# Altium PCB FPW1-0-2.PcbDoc (part 6 of 11)
Units mm, origin at the board's own origin, x right, y up, seen from the top; angles counter-clockwise.
Board outline 85 x 56 mm, 4 copper layers (Top Layer, GND_Plane, 3V3_Plane, Bottom Layer); 182 components, 321 nets, 1106 pads, 360 vias.
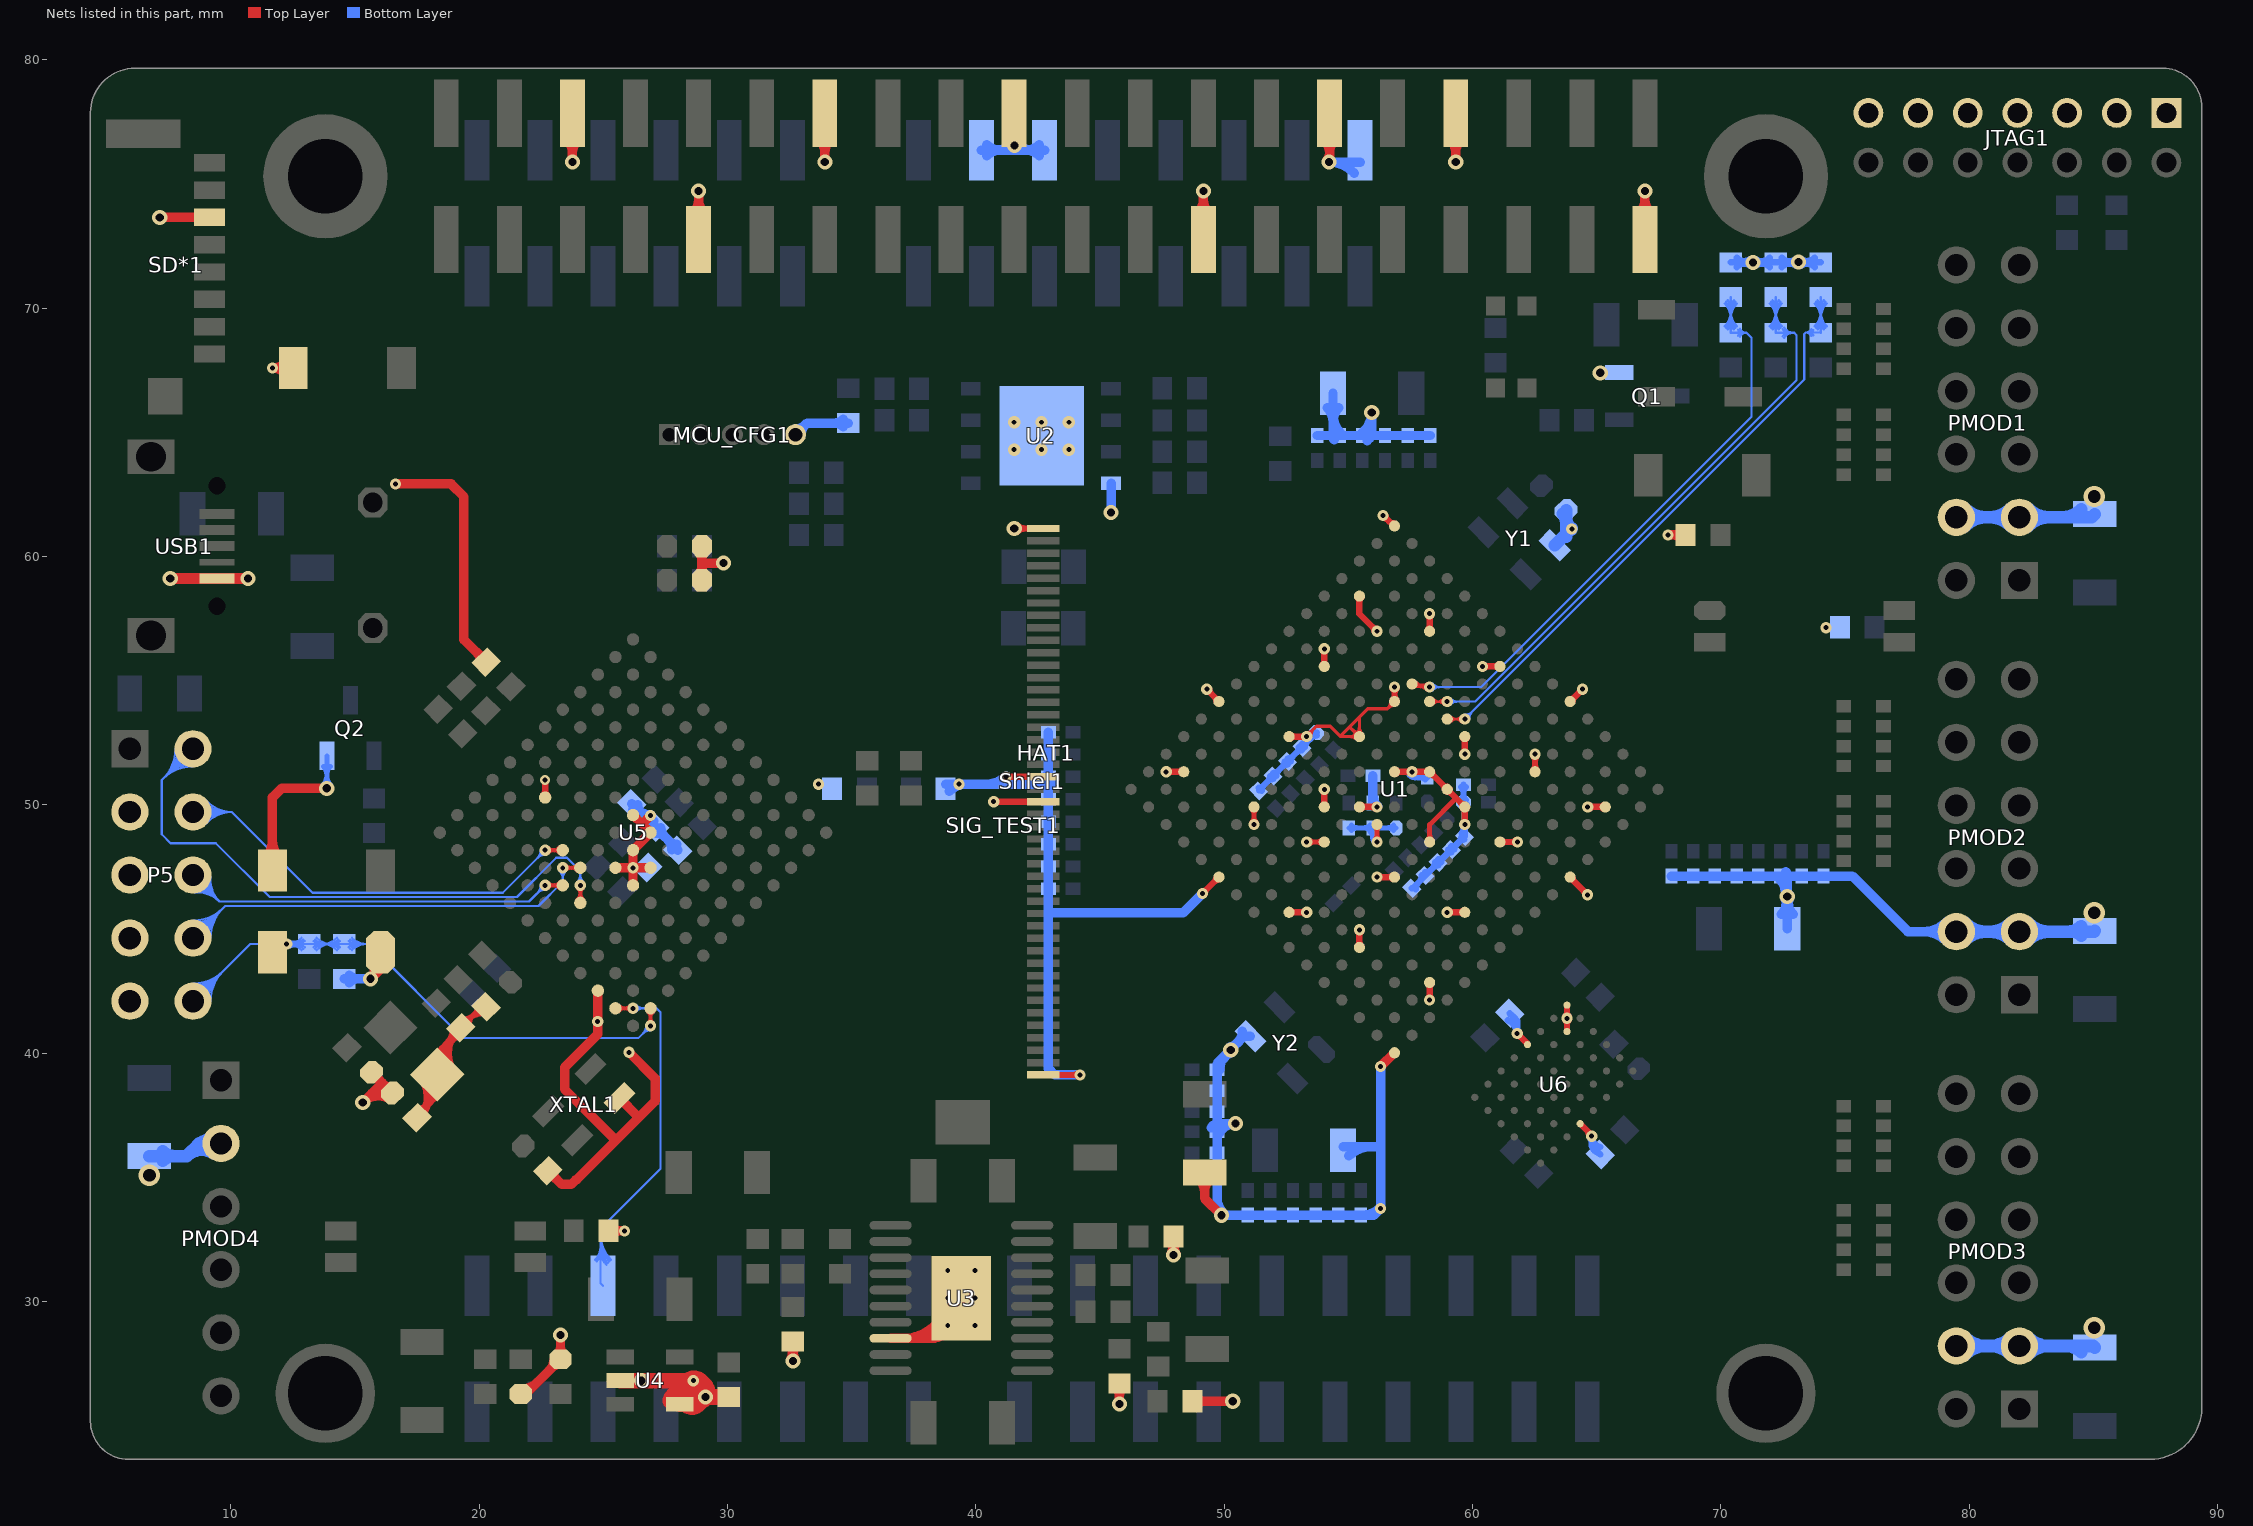
[diagram p8: the nets of this part, all layers, seen from the top]

## Via types
v1: diameter 0.45, hole 0.2, Top Layer to Bottom Layer, tented both sides, 280 vias
v2: diameter 0.61, hole 0.33, Top Layer to Bottom Layer, tented both sides, 40 vias
v3: diameter 0.403, hole 0.2, Top Layer to Bottom Layer, tented both sides, 15 vias
v4: diameter 0.5, hole 0.2, Top Layer to Bottom Layer, tented both sides, 12 vias
v5: diameter 0.864, hole 0.508, Top Layer to Bottom Layer, tented both sides, 11 vias
v6: diameter 0.864, hole 0.356, Top Layer to Bottom Layer, tented both sides, 1 vias
v7: diameter 0.864, hole 0.381, Top Layer to Bottom Layer, tented both sides, 1 vias

## Nets (pads, with @x,y where several pads share a name; then routed paths per layer and width w, separated by ;. In a path a pad name is that pad's centre, name@x,y a point inside that pad or via, vN(x,y) a via of type N, cw(c..) or ccw(c..) an arc to the next point about the centre after c; other vN are vias at no path point) (continued)
GND: C1.2 C2.1 C3.2 C4.2 C5.2 C6.2 C7.2 C8.2 C9.1 C10.2 C11.2 C12.2 C13.2 C15.2 C16.2 C17.2 C18.2 C19.2 C20.2 C21.2 C22.2 C23.2 C24.2 C25.2 C26.2 C27.2 C28.1 C29.2 C30.2 C31.2 C32.2 C33.2 C34.2 C35.1 C36.2 C37.2 C38.2 C39.2 C40.2 C41.2 C42.2 C43.2 C44.2 C45.2 C46.2 C47.2 C48.2 C49.2 C50.2 C51.2 C52.2 C53.2 C54.2 C55.2 C56.2 C58.1 C59.2 C60.2 C61.2 C62.1 C63.2 C64.1 C65.1 C66.1 C67.1 C68.1 C69.1 C70.1 C71.1 C72.2 C73.2 FB2.1 HAT1.6 HAT1.9 HAT1.14 HAT1.20 HAT1.25 HAT1.30 HAT1.34 HAT1.39 JTAG1.1 JTAG1.3 JTAG1.5 JTAG1.7 JTAG1.9 JTAG1.11 JTAG1.13 L1.2 L2.2 MCU_CFG1.5 P5.3 P5.5 P5.7 P5.9 PMOD1.3 PMOD1.4 PMOD2.3 PMOD2.4 PMOD3.3 PMOD3.4 PMOD4.2 Q1.2 Q2.2 R2.1 R5.1 R7.1 R28.1 R30.2 R34.1 R35.1 R39.1 R41.1 R53.1 R54.1 R55.1 R56.1 S1.1 S4.2 S5.1 SD*1.6 Shiel1.16 Shiel1.18 Shiel1.28 SIG_TEST1.1 SIG_TEST1.21 SIG_TEST1.23 SIG_TEST1.45 U1.A1 U1.A11 U1.B8 U1.C5 U1.C15 U1.D2 U1.D12 U1.E9 U1.F6 U1.F10 U1.F16 U1.G3 U1.G9 U1.G13 U1.H6 U1.J9 U1.J11 U1.K4 U1.K6 U1.K7 U1.K8 U1.K14 U1.L1 U1.L11 U1.M8 U1.N5 U1.N15 U1.P2 U1.P12 U1.R9 U1.T6 U1.T16 U2.4 U2.9 U3.8 U3.21 U4.2 U4.4 U5.F6 U5.F7 U5.G7 U5.G8 U5.H3 U5.H7 U5.H8 U5.M10 U6.A1 U6.B2 U6.D1 U6.E6 USB1.5 XTAL1.2 Y1.2 Y2.2 | length 411.1
  Top Layer w0.127: v1@53.298,52.752 53.713,53.167 54.275,53.167 54.69,52.752 ; v1@53.323,52.913 ccw(c53.323,53.243) 53.556,53.01 ; v1@53.484,52.752 cw(c53.934,52.752) 53.616,53.07 ; U1.J11@55.283,52.752 ccw(c54.893,52.752) 55.168,53.027 ccw(c55.444,53.303) U1.J11@55.444,52.913 ; U1.J11@55.33,52.638 ccw(c55.054,52.362) 55.054,52.752 ccw(c55.054,53.142) 55.33,52.866 ccw(c55.054,53.142) 55.444,53.142 ccw(c55.834,53.142) U1.J11@55.558,52.866 ; U1.L11@56.697,54.166 cw(c56.307,54.166) 56.583,53.89 cw(c56.858,53.615) U1.L11@56.858,54.004 ; U1.L11@56.858,54.166 56.569,53.877 55.782,53.877 55.444,53.539 ; 54.69,52.752 54.69,52.785 55.061,53.156 ; 54.69,52.752 U1.J11@55.444,52.752 ; 55.061,53.156 55.444,53.539 ; 55.061,53.156 55.061,53.135 U1.J11@55.444,52.752 ; U1.J11@55.444,52.752 55.444,53.539
  Top Layer w0.203: v1@51.114,49.303 ccw(c50.904,49.514) 51.201,49.514 ccw(c51.499,49.514) v1@51.289,49.303 ; U1.D12@51.114,49.836 cw(c50.904,49.625) 51.201,49.625 cw(c51.499,49.625) U1.D12@51.289,49.836 ; v1(51.201,49.216) U1.D12@51.201,49.923 ; v1(53.323,48.509) U1.E9@54.03,48.509 ; v1@53.41,48.422 cw(c53.621,48.211) 53.621,48.509 cw(c53.621,48.807) v1@53.41,48.596 ; U1.E9@53.943,48.422 ccw(c53.732,48.211) 53.732,48.509 ccw(c53.732,48.807) U1.E9@53.943,48.596 ; U1.H6@58.185,48.596 ccw(c57.975,48.807) 58.273,48.807 ccw(c58.57,48.807) U1.H6@58.36,48.596 ; U1.H6@58.273,48.509 58.273,49.205 59.326,50.258 59.326,50.284 ; U1.K7@58.928,50.579 U1.K7@58.98,50.63
  Top Layer w0.254: U5.H3@22.577,50.388 ccw(c22.367,50.598) 22.664,50.598 ccw(c22.961,50.598) U5.H3@22.751,50.388 ; U5.H3@22.664,50.301 v3(22.664,51.008) ; v1(40.721,50.131) SIG_TEST1.23@42.721,50.131 ; v1@40.79,50.062 cw(c40.958,49.895) 40.958,50.131 cw(c40.958,50.368) v1@40.79,50.201 ; v1(41.221,51.131) SIG_TEST1.21@42.721,51.131 ; v1@41.29,51.062 cw(c41.458,50.895) 41.458,51.131 cw(c41.458,51.368) v1@41.29,51.201 ; v2(41.548,61.131) SIG_TEST1.1@42.721,61.131 ; v2@41.674,61.006 cw(c41.977,60.702) 41.977,61.131 cw(c41.977,61.561) v2@41.674,61.257 ; SIG_TEST1.45@42.721,39.131 v1(44.199,39.131) ; v1@44.129,39.062 ccw(c43.962,38.895) 43.962,39.131 ccw(c43.962,39.368) v1@44.129,39.201 ; v1(47.666,51.337) U1.C15@48.373,51.337 ; v1@47.735,51.268 cw(c47.903,51.101) 47.903,51.337 cw(c47.903,51.574) v1@47.735,51.407 ; U1.C15@48.304,51.268 ccw(c48.136,51.101) 48.136,51.337 ccw(c48.136,51.574) U1.C15@48.304,51.407 ; v1(49.124,46.431) U1.A11@49.787,47.095 ; v1@49.124,46.529 ccw(c49.124,46.766) 49.291,46.598 ccw(c49.458,46.431) v1@49.222,46.431 ; v1@49.301,54.563 cw(c49.301,54.326) 49.469,54.494 cw(c49.636,54.661) v1@49.399,54.661 ; v1(49.301,54.661) 49.787,54.175 U1.F16@49.787,54.166 ; 49.614,54.349 cw(c49.431,54.166) U1.F16@49.689,54.166 ; U1.A11@49.689,47.095 cw(c49.453,47.095) 49.62,46.928 cw(c49.787,46.76) U1.A11@49.787,46.997 ; U1.B8@52.616,45.681 v1(53.323,45.681) ; U1.G13@52.616,52.752 v1@53.298,52.752 ; U1.B8@52.685,45.611 cw(c52.852,45.444) 52.852,45.681 cw(c52.852,45.917) U1.B8@52.685,45.75 ; U1.G13@52.685,52.682 cw(c52.852,52.515) 52.852,52.752 cw(c52.852,52.988) U1.G13@52.685,52.821 ; v1@53.253,45.611 ccw(c53.086,45.444) 53.086,45.681 ccw(c53.086,45.917) v1@53.253,45.75 ; v1@53.253,52.682 ccw(c53.086,52.515) 53.086,52.752 ccw(c53.086,52.988) v1@53.253,52.821 ; U1.F10@53.961,49.993 ccw(c53.793,50.16) 54.03,50.16 ccw(c54.266,50.16) U1.F10@54.099,49.993 ; v1@53.961,50.561 cw(c53.793,50.394) 54.03,50.394 cw(c54.266,50.394) v1@54.099,50.561 ; U1.K14@53.961,55.649 ccw(c53.793,55.817) 54.03,55.817 ccw(c54.266,55.817) U1.K14@54.099,55.649 ; v1@53.961,56.218 cw(c53.793,56.051) 54.03,56.051 cw(c54.266,56.051) v1@54.099,56.218 ; v1(54.03,50.63) U1.F10@54.03,49.923 U1.F10@54.043,49.91 ; U1.K14@54.03,55.58 v1(54.03,56.287) ; U1.C5@55.375,44.336 ccw(c55.208,44.503) 55.444,44.503 ccw(c55.681,44.503) U1.C5@55.513,44.336 ; v1@55.375,44.904 cw(c55.208,44.737) 55.444,44.737 cw(c55.681,44.737) v1@55.513,44.904 ; U1.N15@55.375,58.339 cw(c55.208,58.172) 55.444,58.172 cw(c55.681,58.172) U1.N15@55.513,58.339 ; U1.C5@55.444,44.266 v1(55.444,44.974) ; U1.G9@55.444,49.923 v1(56.151,49.923) ; U1.N15@55.444,58.409 55.444,57.697 v1(56.147,56.994) ; U1.G9@55.513,49.854 cw(c55.681,49.687) 55.681,49.923 cw(c55.681,50.16) U1.G9@55.513,49.993 ; v1@56.049,56.994 ccw(c55.812,56.994) 55.979,57.162 ccw(c56.147,57.329) v1@56.147,57.092 ; v1@56.082,49.854 ccw(c55.915,49.687) 55.915,49.923 ccw(c55.915,50.16) v1@56.082,49.993 ; v1(56.151,47.095) U1.F6@56.858,47.095 ; v1@56.221,47.026 cw(c56.388,46.858) 56.388,47.095 cw(c56.388,47.331) v1@56.221,47.164 ; v1@56.401,61.561 cw(c56.401,61.324) 56.568,61.491 cw(c56.735,61.658) v1@56.499,61.658 ; v1(56.401,61.658) 56.822,61.237 U1.T16@56.858,61.237 ; 56.629,61.43 ccw(c56.858,61.659) U1.T16@56.858,61.335 ; U1.F6@56.789,47.026 ccw(c56.622,46.858) 56.622,47.095 ccw(c56.622,47.331) U1.F6@56.789,47.164 ; U1.L11@56.789,54.235 ccw(c56.622,54.403) 56.858,54.403 ccw(c57.095,54.403) U1.L11@56.928,54.235 ; v1@56.789,54.68 cw(c56.622,54.513) 56.858,54.513 cw(c57.095,54.513) v1@56.928,54.68 ; U1.A1@56.851,40.024 U1.A1@56.858,40.024 ; U1.J9@56.858,51.337 U1.K8@58.273,51.337 U1.K7@58.98,50.63 59.326,50.284 U1.K6@59.687,49.923 v1(59.687,49.216) ; U1.L11@56.858,54.166 v1(56.858,54.75) ; U1.J9@56.928,51.268 cw(c57.095,51.101) 57.095,51.337 cw(c57.095,51.574) U1.J9@56.928,51.407 ; v1@57.496,51.268 ccw(c57.329,51.101) 57.329,51.337 ccw(c57.329,51.574) v1@57.496,51.407 ; v1@57.635,51.268 cw(c57.802,51.101) 57.802,51.337 cw(c57.802,51.574) v1@57.635,51.407 ; v1@58.203,42.214 ccw(c58.036,42.382) 58.273,42.382 ccw(c58.509,42.382) v1@58.342,42.214 ; U1.D2@58.203,42.783 cw(c58.036,42.616) 58.273,42.616 cw(c58.509,42.616) U1.D2@58.342,42.783 ; U1.K8@58.203,51.268 ccw(c58.036,51.101) 58.036,51.337 ccw(c58.036,51.574) U1.K8@58.203,51.407 ; U1.P12@58.203,57.064 ccw(c58.036,57.231) 58.273,57.231 ccw(c58.509,57.231) U1.P12@58.342,57.064 ; v1@58.203,57.632 cw(c58.036,57.465) 58.273,57.465 cw(c58.509,57.465) v1@58.342,57.632 ; v1(58.273,42.145) U1.D2@58.273,42.852 ; U1.K8@58.273,51.239 cw(c58.273,51.003) 58.44,51.17 cw(c58.607,51.337) U1.K8@58.371,51.337 ; U1.P12@58.273,56.994 v1(58.273,57.701) ; U1.K7@58.882,50.63 ccw(c58.645,50.63) 58.812,50.798 ccw(c58.98,50.965) U1.K7@58.98,50.728 ; v1(58.98,45.681) U1.G3@59.687,45.681 ; U1.K7@58.98,50.532 cw(c58.98,50.296) 59.147,50.463 cw(c59.314,50.63) U1.K7@59.078,50.63 ; v1@59.049,45.611 cw(c59.216,45.444) 59.216,45.681 cw(c59.216,45.917) v1@59.049,45.75 ; U1.K6@59.589,49.923 ccw(c59.352,49.923) 59.519,50.091 ccw(c59.687,50.258) U1.K6@59.687,50.021 ; U1.G3@59.617,45.611 ccw(c59.45,45.444) 59.45,45.681 ccw(c59.45,45.917) U1.G3@59.617,45.75 ; v1@59.617,49.285 ccw(c59.45,49.453) 59.687,49.453 ccw(c59.923,49.453) v1@59.756,49.285 ; U1.K6@59.617,49.854 cw(c59.45,49.687) 59.687,49.687 cw(c59.923,49.687) U1.K6@59.756,49.854 ; v1@59.617,52.114 ccw(c59.45,52.281) 59.687,52.281 ccw(c59.923,52.281) v1@59.756,52.114 ; U1.M8@59.617,52.682 cw(c59.45,52.515) 59.687,52.515 cw(c59.923,52.515) U1.M8@59.756,52.682 ; v1(59.687,52.045) U1.M8@59.687,52.752 ; v1(60.394,55.58) U1.R9@61.101,55.58 ; v1@60.463,55.511 cw(c60.63,55.344) 60.63,55.58 cw(c60.63,55.817) v1@60.463,55.649 ; U1.R9@61.032,55.511 ccw(c60.864,55.344) 60.864,55.58 ccw(c60.864,55.817) U1.R9@61.032,55.649 ; U1.K4@61.101,48.509 v1(61.808,48.509) ; U1.K4@61.17,48.44 cw(c61.338,48.272) 61.338,48.509 cw(c61.338,48.746) U1.K4@61.17,48.578 ; v1@61.739,48.44 ccw(c61.571,48.272) 61.571,48.509 ccw(c61.571,48.746) v1@61.739,48.578 ; v1@61.798,40.707 cw(c61.798,40.471) 61.965,40.638 cw(c62.133,40.805) v1@61.896,40.805 ; v1(61.798,40.805) 62.211,40.393 U6.D1@62.211,40.351 ; U1.N5@62.446,51.407 ccw(c62.279,51.574) 62.515,51.574 ccw(c62.752,51.574) U1.N5@62.584,51.407 ; v1@62.446,51.975 cw(c62.279,51.808) 62.515,51.808 cw(c62.752,51.808) v1@62.584,51.975 ; U1.N5@62.515,51.337 v1(62.515,52.045) ; v1@63.732,41.343 cw(c63.565,41.175) 63.802,41.175 cw(c64.038,41.175) v1@63.871,41.343 ; v1@63.732,41.481 ccw(c63.565,41.649) 63.802,41.649 ccw(c64.038,41.649) v1@63.871,41.481 ; U6.B2@63.802,40.882 v1(63.802,41.412) U6.A1@63.802,41.942 ; U1.L1@63.929,47.095 63.929,47.082 v1(64.627,46.385) ; U1.T6@63.929,54.166 63.932,54.166 v1(64.427,54.661) ; U1.T6@63.929,54.264 ccw(c63.929,54.507) 64.102,54.335 ; U1.L1@64.027,47.095 ccw(c64.295,47.095) 64.106,46.906 ; U1.T6@64.027,54.166 cw(c64.257,54.166) 64.095,54.328 ; v1@64.329,54.661 cw(c64.093,54.661) 64.26,54.494 cw(c64.427,54.326) v1@64.427,54.563 ; U6.E6@64.332,37.169 64.795,36.706 v1(64.795,36.665) ; v1@64.529,46.385 ccw(c64.292,46.385) 64.459,46.552 ccw(c64.627,46.72) v1@64.627,46.483 ; 64.599,36.902 cw(c64.361,36.665) v1@64.697,36.665 ; v1(64.636,49.923) U1.P2@65.344,49.923 ; v1@64.706,49.854 cw(c64.873,49.687) 64.873,49.923 cw(c64.873,50.16) v1@64.706,49.993 ; U1.P2@65.274,49.854 ccw(c65.107,49.687) 65.107,49.923 ccw(c65.107,50.16) U1.P2@65.274,49.993
  Top Layer w0.381: v2(7.147,73.657) SD*1.6@9.144,73.657 ; SD*1.6@8.756,73.544 ccw(c8.484,73.272) 8.484,73.657 ccw(c8.484,74.042) SD*1.6@8.756,73.77 ; S4.2@11.412,47.905 ccw(c10.756,48.562) 11.684,48.562 ccw(c12.612,48.562) S4.2@11.956,47.905 ; S4.2@11.684,47.358 11.684,50.305 12.05,50.67 v2(13.871,50.67) ; S1.1@12.238,67.337 ccw(c11.684,66.855) v1(11.684,67.589) ; S1.1@12.238,67.842 cw(c11.684,68.324) v1(11.684,67.589) ; S1.1@12.528,67.589 v1(11.684,67.589) ; C65.1@15.671,39.034 cw(c15.671,38.528) 16.029,38.886 cw(c16.387,39.243) C65.1@15.881,39.243 ; C65.1@15.671,39.243 16.104,38.811 ; 15.681,38.389 cw(c16.208,37.863) C64.1@16.555,38.521 ; S5.1@15.706,43.594 cw(c15.294,43.342) v2(15.635,43.001) 16.034,43.4 S5.1@16.034,44.069 ; C64.1@16.377,38.184 ccw(c15.955,37.385) v2(15.316,38.024) 16.104,38.811 ; C64.1@16.51,38.404 16.104,38.811 ; v1(16.637,62.928) 18.872,62.928 19.393,62.408 19.393,56.655 R41.1@20.295,55.753 ; R41.1@20.085,55.753 ccw(c19.58,55.753) 19.937,56.11 ccw(c20.295,56.468) R41.1@20.295,55.962 ; R34.1@21.679,26.288 21.879,26.288 C58.1@23.279,27.688 v2(23.279,28.664) ; R34.1@21.729,26.497 ccw(c21.729,27.365) 22.343,26.751 ; C62.1@22.771,35.071 cw(c22.771,34.566) 23.128,34.923 cw(c23.486,35.281) C62.1@22.98,35.281 ; C62.1@22.771,35.281 23.33,34.722 23.711,34.722 23.901,34.912 23.927,34.912 27.089,38.075 27.089,38.989 v1(26.035,40.043) ; 22.836,27.245 ccw(c22.393,27.688) C58.1@23.02,27.688 ; C58.1@22.957,27.365 cw(c23.229,27.093) C58.1@23.229,27.478 ; C58.1@23.131,27.836 ccw(c22.773,28.193) 23.279,28.193 ccw(c23.785,28.193) C58.1@23.427,27.836 ; HAT1.6@23.543,76.782 cw(c23.015,76.254) 23.762,76.254 cw(c24.509,76.254) HAT1.6@23.981,76.782 ; v2(23.762,75.882) HAT1.6@23.762,77.851 ; U5.M10@24.785,42.523 24.785,40.774 23.444,39.433 23.444,38.557 25.489,36.512 ; R56.1@25.211,32.855 v1(25.857,32.855) ; R56.1@25.359,32.707 cw(c25.717,32.349) 25.717,32.855 cw(c25.717,33.361) R56.1@25.359,33.003 ; U5.H7@25.492,47.473 v1(26.199,47.473) ; XTAL1.2@25.651,38.2 26.405,37.446 ; U5.H8@26.199,46.765 v1(26.199,47.473) ; U5.F6@26.199,49.594 26.549,49.244 U5.F7@26.906,48.887 U5.G7@26.199,48.18 v1(26.199,47.473) ; 26.58,49.244 v1(26.906,49.57) ; U5.G8@26.906,47.473 v1(26.199,47.473) ; HAT1.9@28.623,73.84 ccw(c28.095,74.368) 28.842,74.368 ccw(c29.589,74.368) HAT1.9@29.061,73.84 ; L1.2@28.822,59.253 ccw(c28.464,59.611) 28.97,59.611 ccw(c29.476,59.611) L1.2@29.118,59.253 ; L2.2@28.822,60.216 cw(c28.464,59.858) 28.97,59.858 cw(c29.476,59.858) L2.2@29.118,60.216 ; HAT1.9@28.842,72.771 v2(28.842,74.714) ; L1.2@28.97,59.055 28.97,59.741 ; L2.2@28.97,60.414 28.97,59.741 ; v2@29.07,26.111 v2(29.12,26.16) ; v2(29.845,59.741) 28.97,59.741 ; R30.2@32.487,28.248 cw(c32.12,27.881) v2@32.639,27.881 ; v2@32.544,27.673 ccw(c32.184,27.911) R30.2@32.601,28.023 ; R30.2@32.635,28.396 32.639,28.392 v2(32.639,27.61) ; v2@32.639,27.899 cw(c33.131,27.899) R30.2@32.783,28.248 ; R30.2@32.671,28.02 ccw(c33.071,27.913) v2@32.732,27.676 ; HAT1.14@33.703,76.782 cw(c33.175,76.254) 33.922,76.254 cw(c34.669,76.254) HAT1.14@34.141,76.782 ; v2(33.922,75.882) HAT1.14@33.922,77.851 ; U3.8@36.571,28.525 38.346,28.525 v4(38.871,29.05) ; U3.8@37.08,28.525 ccw(c37.08,30.336) U3.21@38.818,29.827 ; 37.588,28.525 ccw(c37.588,30.187) U3.21@39.183,29.719 ; 38.097,28.525 ccw(c38.097,30.038) U3.21@39.549,29.612 ; U3.21@38.273,28.587 ccw(c37.955,29.488) U3.21@38.817,29.075 ; U3.21@38.627,28.988 cw(c38.746,28.723) U3.21@38.85,28.994 ; U3.21@38.859,29.108 ccw(c38.664,30.091) U3.21@39.497,29.534 ; U3.21@38.928,29.066 cw(c39.24,29.155) U3.21@38.957,29.313 ; C61.2@45.635,26.558 cw(c45.278,26.201) 45.784,26.201 cw(c46.289,26.201) C61.2@45.932,26.558 ; v2(45.784,25.883) C61.2@45.784,26.707 ; C60.2@47.809,32.428 cw(c47.451,32.071) 47.957,32.071 cw(c48.462,32.071) C60.2@48.105,32.428 ; v2@47.862,31.952 ccw(c47.563,32.151) C60.2@47.91,32.244 ; v2(47.957,31.888) C60.2@47.957,32.626 ; C60.2@48.003,32.244 ccw(c48.35,32.151) v2@48.052,31.952 ; R35.1@48.719,25.997 v2(50.343,25.997) ; R35.1@48.867,25.849 cw(c49.224,25.491) 49.224,25.997 cw(c49.224,26.503) R35.1@48.867,26.145 ; HAT1.25@48.943,73.84 ccw(c48.415,74.368) 49.162,74.368 ; C6.2@48.976,34.968 cw(c48.405,34.397) 49.212,34.397 cw(c50.02,34.397) C6.2@49.449,34.968 ; HAT1.25@49.162,72.771 v2(49.162,74.714) ; 49.162,74.368 ccw(c49.909,74.368) HAT1.25@49.381,73.84 ; C6.2@49.212,35.204 49.212,34.163 v2(49.89,33.485) ; HAT1.30@54.023,76.782 cw(c53.495,76.254) 54.242,76.254 cw(c54.989,76.254) HAT1.30@54.461,76.782 ; v2@54.135,75.963 ccw(c53.879,76.22) 54.242,76.22 ; v2(54.216,75.882) 54.242,75.908 HAT1.30@54.242,77.851 ; v1(56.299,39.472) U1.A1@56.851,40.024 ; HAT1.34@59.103,76.782 cw(c58.575,76.254) 59.322,76.254 cw(c60.069,76.254) HAT1.34@59.541,76.782 ; v2(59.322,75.882) HAT1.34@59.322,77.851 ; HAT1.39@66.723,73.84 ccw(c66.195,74.368) 66.942,74.368 ccw(c67.689,74.368) HAT1.39@67.161,73.84 ; HAT1.39@66.942,72.771 v2(66.942,74.714) ; v1(67.869,60.871) R28.1@68.579,60.871 ; R28.1@68.43,60.723 ccw(c68.073,60.365) 68.073,60.871 ccw(c68.073,61.377) R28.1@68.43,61.019 ; 16.153,38.762 cw(c15.795,38.404) C64.1@16.301,38.404 ; 16.153,38.762 ccw(c16.51,39.12) C64.1@16.51,38.614 ; 16.153,38.762 cw(c15.795,38.404) C64.1@16.301,38.404 ; 16.153,38.762 ccw(c16.51,39.12) C64.1@16.51,38.614 ; 16.153,38.762 cw(c15.795,38.404) C64.1@16.301,38.404 ; 16.153,38.762 ccw(c16.51,39.12) C64.1@16.51,38.614
  Top Layer w0.432: v2(7.566,59.122) USB1.5@9.449,59.122 v2(10.703,59.122)
  Top Layer w0.635: U4.2@25.686,26.822 v2(26.543,26.822) 28.067,26.822 ; U4.4@27.696,26 cw(c28.141,25.911) 28.141,26.365 ; U4.4@28.086,26.115 cw(c28.961,26.115) v1@28.586,26.906 ; 28.086,26.282 cw(c28.728,26.282) v1@28.609,26.913 ; U4.4@28.319,25.876 cw(c28.915,25.757) v2@28.915,26.365 ; U4.4@28.324,25.859 ccw(c28.571,26.133) 28.831,25.872 ; U4.4@28.334,25.855 ccw(c28.437,26.744) v2@29.07,26.111 ; U4.4@28.455,25.872 ccw(c28.455,26.825) v2@29.129,26.152 ; v1@28.626,26.915 cw(c28.626,26.464) 28.945,26.783 ; v1@28.653,26.911 cw(c28.482,26.348) v2@29.07,26.348 ; 28.656,26.365 cw(c28.656,25.697) v2@29.129,26.169 ; v1@28.672,26.742 cw(c28.422,27.177) 28.067,26.822 ; v1@28.677,26.746 cw(c28.417,27.134) 28.086,26.803 ; v1@28.685,26.893 cw(c27.988,26.066) v2@29.07,26.066 ; v1@28.712,26.788 cw(c28.086,27.04) 28.086,26.365 ; v2@29.13,26.154 ccw(c28.78,26.367) 29.07,26.657 ; v2@29.132,26.159 ccw(c28.342,26.259) 28.905,26.822 ; C59.2@30.048,26.16 v2(29.12,26.16) v2@29.07,26.21 ; 28.067,26.822 28.086,26.803 ; 28.067,26.822 v1(28.626,26.822) 28.905,26.822 ; 28.086,26.365 v2@28.915,26.365 ; 28.086,26.365 U4.4@28.086,25.872 28.832,25.872 ; 28.086,26.365 28.086,26.803 ; 28.832,25.872 v2@29.07,26.111 ; 28.905,26.822 29.07,26.657 ; v2@28.915,26.365 v2@29.07,26.21 ; v2@29.07,26.111 v2@29.07,26.21 ; v2@29.07,26.21 29.07,26.657
  Bottom Layer w0.203: v2@13.727,50.814 ccw(c13.38,51.161) 13.871,51.161 ccw(c14.361,51.161) v2@14.015,50.814 ; Q2.2@13.731,51.558 cw(c13.392,51.22) 13.871,51.22 cw(c14.35,51.22) Q2.2@14.011,51.558 ; v2(13.871,50.67) Q2.2@13.871,51.974
  Bottom Layer w0.254: C23.2@51.386,50.692 ccw(c51.386,50.959) 51.575,50.77 ; C23.2@51.399,50.582 51.399,50.595 C13.2@53.126,52.322 ; C23.2@51.509,50.569 cw(c51.837,50.569) 51.605,50.801 ; C21.2@51.847,51.166 cw(c51.551,51.166) 51.76,50.956 cw(c51.97,50.746) C21.2@51.97,51.043 ; C21.2@51.97,51.289 ccw(c51.97,51.586) 52.18,51.376 ccw(c52.39,51.166) C21.2@52.093,51.166 ; C18.2@52.432,51.75 cw(c52.135,51.75) 52.345,51.54 cw(c52.555,51.331) C18.2@52.555,51.627 ; C18.2@52.555,51.873 ccw(c52.555,52.17) 52.765,51.96 ccw(c52.975,51.75) C18.2@52.678,51.75 ; C13.2@53.003,52.322 cw(c52.706,52.322) 52.916,52.112 cw(c53.126,51.902) C13.2@53.126,52.199 ; C13.2@53.105,52.398 ccw(c52.966,52.637) v1@53.229,52.722 ; C13.2@53.126,52.445 ccw(c53.126,52.742) 53.336,52.532 ccw(c53.546,52.322) C13.2@53.249,52.322 ; v1@53.229,52.724 cw(c52.839,52.609) C13.2@53.126,52.322 ; v1@53.258,52.678 cw(c53.143,52.547) C13.2@53.294,52.46 ; v1@53.359,52.843 ccw(c53.483,53.159) C8.2@53.723,52.919 C13.2@53.126,52.322 ; v1@53.362,52.842 ccw(c53.45,53.047) C8.2@53.644,52.935 ; C8.2@53.6,52.919 cw(c53.303,52.919) 53.513,52.709 cw(c53.723,52.499) C8.2@53.723,52.796 ; v1@57.439,51.246 ccw(c57.681,51.421) 57.681,51.122 ; v1@57.527,51.337 v1(57.565,51.337) 57.781,51.122 FB2.1@58.179,51.122 cw(c58.179,51.781) v1@57.645,51.395 ; C22.2@57.552,46.647 57.59,46.647 C20.2@59.675,48.732 59.687,48.743 v1(59.687,49.216) 59.687,50.025 C28.1@59.635,50.078 ; C22.2@57.711,46.612 cw(c58.087,46.612) 57.821,46.877 ; 57.853,46.91 ccw(c57.594,47.168) C15.2@57.96,47.168 ; C15.2@58.083,47.291 ccw(c58.083,47.657) 58.342,47.398 ; FB2.1@58.092,51.035 ccw(c57.882,50.825) 57.882,51.122 ccw(c57.882,51.419) FB2.1@58.092,51.209 ; 58.39,47.447 ccw(c58.148,47.689) C10.2@58.491,47.689 ; 58.436,47.493 cw(c58.614,47.315) C10.2@58.614,47.566 ; C10.2@58.614,47.812 ccw(c58.614,48.155) 58.856,47.913 ; C10.2@58.737,47.689 cw(c58.988,47.689) 58.81,47.867 ; 58.928,47.985 ccw(c58.702,48.211) C19.2@59.022,48.211 ; 58.951,48.007 cw(c59.145,47.814) C19.2@59.145,48.088 ; C19.2@59.145,48.334 ccw(c59.145,48.654) 59.371,48.427 ; C19.2@59.268,48.211 cw(c59.542,48.211) 59.348,48.404 ; C28.1@59.548,50.201 ccw(c59.338,50.411) 59.635,50.411 ccw(c59.931,50.411) C28.1@59.721,50.201 ; C35.1@59.548,50.726 cw(c59.338,50.516) 59.635,50.516 cw(c59.931,50.516) C35.1@59.721,50.726 ; C20.2@59.552,48.732 cw(c59.255,48.732) 59.465,48.522 cw(c59.675,48.312) C20.2@59.675,48.609 ; C28.1@59.598,50.027 cw(c59.382,49.812) 59.687,49.812 ; v1@59.617,49.147 cw(c59.45,48.98) 59.687,48.98 cw(c59.923,48.98) v1@59.756,49.147 ; v1@59.617,49.285 ccw(c59.45,49.453) 59.687,49.453 ccw(c59.923,49.453) v1@59.756,49.285 ; C28.1@59.635,50.166 C35.1@59.635,50.813 ; 59.687,49.823 cw(c59.976,49.823) C28.1@59.771,50.027 ; C71.1@61.421,41.331 cw(c61.176,40.76) v1@61.798,40.76 ; C71.1@61.493,41.618 61.798,41.312 v1(61.798,40.805) ; C71.1@61.521,41.565 cw(c61.341,41.145) 61.798,41.145 ; 61.718,41.058 ccw(c61.986,41.13) v1@61.847,40.89 ; v1@61.729,40.874 ccw(c61.562,41.042) 61.798,41.042 ccw(c62.035,41.042) v1@61.867,40.874 ; v1@64.726,36.596 cw(c64.559,36.428) 64.795,36.428 cw(c65.032,36.428) v1@64.865,36.596 ; 64.795,36.358 ccw(c65.178,36.358) C70.1@65.107,35.983 ; C70.1@65.139,35.929 64.795,36.272 v1(64.795,36.665) ccw(c65.236,36.665) C70.1@65.154,36.232 ; R7.1@70.396,71.845 R5.1@72.206,71.845 R2.1@74.016,71.845 ; R7.1@70.639,71.652 cw(c71.105,71.186) 71.105,71.845 cw(c71.105,72.504) R7.1@70.639,72.038 ; 70.851,71.913 ccw(c70.945,72.263) v2@71.173,71.982 ; 70.852,71.845 cw(c70.852,71.411) v2@71.159,71.718 ; 70.856,71.779 cw(c70.946,71.443) v2@71.17,71.708 ; 70.859,71.845 ccw(c70.859,72.27) v2@71.159,71.97 ; 70.964,71.883 cw(c70.893,71.617) v2@71.131,71.755 ; 70.97,71.809 ccw(c70.901,72.065) v2@71.131,71.933 ; v2@71.397,71.982 ccw(c71.638,72.28) 71.737,71.91 ; v2@71.4,71.708 cw(c71.637,71.427) 71.732,71.782 ; v2@71.411,71.718 cw(c71.718,71.411) 71.718,71.845 ; v2@71.411,71.97 ccw(c71.711,72.27) 71.711,71.845 ; v2@71.439,71.755 cw(c71.653,71.631) 71.589,71.87 ; R5.1@71.963,71.652 ccw(c71.497,71.186) 71.497,71.845 ccw(c71.497,72.504) R5.1@71.963,72.038 ; R5.1@72.449,71.652 cw(c72.915,71.186) 72.915,71.845 cw(c72.915,72.504) R5.1@72.449,72.038 ; 72.659,71.777 cw(c72.772,71.356) v2@73.024,71.711 ; 72.67,71.845 ccw(c72.67,72.313) v2@73.001,71.982 ; 72.695,71.904 ccw(c72.779,72.215) v2@73.003,71.984 ; 72.724,71.845 cw(c72.724,71.454) v2@73.001,71.731 ; 72.803,71.815 ccw(c72.731,72.085) v2@72.973,71.945 ; v2@73.229,71.711 cw(c73.469,71.372) R2.1@73.576,71.773 ; v2@73.251,71.984 ccw(c73.462,72.199) 73.54,71.908 ; v2@73.252,71.731 cw(c73.529,71.454) 73.529,71.845 ; v2@73.252,71.982 ccw(c73.583,72.313) R2.1@73.583,71.845 ; v2@73.281,71.945 ccw(c73.547,72.099) 73.467,71.802 ; R2.1@73.773,71.652 ccw(c73.307,71.186) 73.307,71.845 ccw(c73.307,72.504) R2.1@73.773,72.038 ; C20.2@59.553,48.854 ccw(c59.23,49.177) v1@59.687,49.177 ; C20.2@59.553,48.854 ccw(c59.23,49.177) v1@59.687,49.177 ; C20.2@59.553,48.854 ccw(c59.23,49.177) v1@59.687,49.177 ; v1@59.602,49.166 cw(c59.378,49.033) C20.2@59.63,48.966 ; v1@59.602,49.166 cw(c59.378,49.033) C20.2@59.63,48.966 ; v1@59.602,49.166 cw(c59.378,49.033) C20.2@59.63,48.966
  Bottom Layer w0.381: C69.1@14.58,43.001 v2(15.635,43.001) ; C69.1@14.778,42.853 cw(c15.135,42.495) 15.135,43.001 cw(c15.135,43.506) C69.1@14.778,43.149 ; C66.1@26.15,50.051 28.004,48.197 C67.1@28.004,48.171 ; C66.1@26.185,49.806 cw(c26.185,49.3) 26.543,49.658 cw(c26.9,50.016) C66.1@26.394,50.016 ; C66.1@26.376,49.825 ccw(c26.906,50.355) v1@26.906,49.605 ; 26.675,49.526 cw(c26.295,49.147) C68.1@26.832,49.147 ; v1@26.705,49.495 ccw(c27.041,49.831) C68.1@27.041,49.356 ; C68.1@26.941,49.57 ccw(c27.691,49.57) C68.1@27.161,49.04 ; C68.1@27.112,48.866 cw(c27.112,48.33) 27.491,48.709 ; C68.1@27.322,49.076 ccw(c27.797,49.076) 27.461,48.74 ; 27.593,48.608 cw(c27.192,48.207) C67.1@27.759,48.207 ; 27.654,48.546 ccw(c27.968,48.861) C67.1@27.968,48.416 ; MCU_CFG1.5@32.741,64.91 33.209,65.378 C1.2@34.861,65.378 ; MCU_CFG1.5@32.741,65.144 ccw(c32.741,65.71) 33.141,65.31 ccw(c33.541,64.91) MCU_CFG1.5@32.975,64.91 ; C1.2@34.663,65.23 ccw(c34.306,64.872) 34.306,65.378 ccw(c34.306,65.884) C1.2@34.663,65.526 ; R53.1@38.787,50.838 v1(39.319,50.838) ; R53.1@38.935,50.549 cw(c39.632,49.853) 39.632,50.838 ; Shiel1.16@40.229,76.365 Shiel1.18@42.769,76.365 ; 40.43,50.838 ccw(c40.43,51.923) v1@41.197,51.156 ; Shiel1.16@40.447,76.146 cw(c40.976,75.618) 40.976,76.365 cw(c40.976,77.112) Shiel1.16@40.447,76.584 ; 40.819,76.365 ccw(c40.819,77.291) v2@41.474,76.636 ; v1@41.245,51.156 ccw(c42.013,51.923) 42.013,50.838 ; v2@41.635,76.636 ccw(c42.29,77.291) Shiel1.18@42.29,76.365 ; 42.022,50.838 ccw(c42.022,51.979) C37.2@42.829,51.172 ; Shiel1.18@42.55,76.146 ccw(c42.021,75.618) 42.021,76.365 ccw(c42.021,77.112) Shiel1.18@42.55,76.584 ; 42.921,50.838 v1(39.319,50.838) ; C27.2@42.921,52.934 C32.2@42.921,52.032 C45.2@42.921,49.327 C49.2@42.921,48.425 C53.2@42.921,47.523 C55.2@42.921,46.622 42.921,45.657 ; 42.942,50.838 ccw(c42.942,51.059) C37.2@43.099,50.903 ; v1(44.199,39.131) 43.177,39.131 42.921,39.387 42.921,45.657 ; v2(45.447,61.779) U2.4@45.447,62.954 ; v1(49.124,46.431) 48.349,45.657 42.921,45.657 ; C17.2@49.488,37.01 cw(c49.778,36.833) 49.778,37.173 ; 49.713,34.19 ccw(c50.595,34.19) v2@49.971,33.566 ; C17.2@49.813,36.812 cw(c50.457,36.419) v2(50.457,37.173) 49.713,37.173 ; C16.2@49.822,39.346 cw(c50.676,39.346) v2@50.072,39.95 ; 49.98,39.79 cw(c50.424,39.534) v2@50.291,40.029 ; v2@50.232,40.25 ccw(c50.073,40.844) 50.605,40.536 ; 50.532,40.411 ccw(c50.06,40.883) Y2.2@50.728,40.883 ; Y2.2@51.057,40.689 50.811,40.689 49.713,39.591 49.713,37.173 ; C46.2@53.746,64.876 55.944,64.876 ; C50.2@54.145,66 cw(c53.574,65.429) 54.381,65.429 cw(c55.189,65.429) C50.2@54.618,66 ; 54.381,64.813 ccw(c54.542,64.813) C42.2@54.428,64.699 ; 54.381,64.889 C50.2@54.381,66.586 ; C50.2@54.381,65.733 ccw(c55.462,65.733) C42.2@54.698,64.968 ; C51.2@54.788,36.246 56.299,36.246 ; C51.2@55.025,35.87 cw(c55.933,34.961) 55.933,36.246 ; Shiel1.28@55.243,75.438 ccw(c54.216,74.474) v2(54.216,75.882) Shiel1.28@55.486,75.882 ; C38.2@55.529,64.974 ccw(c54.915,65.799) v2(55.944,65.799) 55.944,64.876 ; C47.2@55.561,33.485 ccw(c55.561,34.495) v1@56.275,33.781 ; C38.2@55.757,64.668 ccw(c55.481,65.04) 55.944,65.04 ; C9.1@55.982,50.081 55.986,50.086 C5.2@55.986,51.181 ; 55.986,50.405 ccw(c56.633,50.405) C9.1@56.176,49.948 ; v1(56.299,39.472) v1(56.299,33.757) 56.028,33.485 C47.2@55.499,33.485 C43.2@54.59,33.485 C39.2@53.68,33.485 C25.2@50.952,33.485 v2(49.89,33.485) 49.713,33.663 C4.2@49.713,35.166 49.713,37.173 ; C24.2@58.293,64.876 C29.2@57.384,64.876 C33.2@56.474,64.876 55.944,64.876 ; C26.2@68.008,47.138 C31.2@68.883,47.138 C36.2@69.757,47.138 C40.2@70.632,47.138 C44.2@71.506,47.138 C48.2@72.606,47.138 ; C48.2@72.339,47.046 cw(c71.54,46.247) v2@72.67,46.247 ; C56.2@72.433,45.608 ccw(c71.862,46.179) 72.67,46.179 ccw(c73.477,46.179) C56.2@72.906,45.608 ; 72.57,46.62 ccw(c72.895,46.708) v2@72.727,46.416 ; v2@72.57,46.26 cw(c72.225,46.061) 72.61,45.957 ; C48.2@72.608,47.315 cw(c72.46,47.167) 72.67,47.167 ; C56.2@72.67,45.021 72.67,47.074 C48.2@72.606,47.138 ; 72.729,45.958 cw(c73.112,46.061) v2@72.768,46.26 ; PMOD2.4@79.081,44.505 ccw(c78.126,43.55) 78.126,44.901 ccw(c78.126,46.252) PMOD2.4@79.081,45.296 ; PMOD2.4@79.477,44.901 77.527,44.901 75.29,47.138 C54.2@74.13,47.138 C52.2@73.255,47.138 C48.2@72.606,47.138 ; v1(39.319,50.838) ccw(c39.319,50.468) 38.98,50.615 cw(c39.319,50.468) v1(39.319,50.838)
  Bottom Layer w0.508: C3.2@6.718,35.865 8.229,35.865 ; C3.2@7.26,35.673 cw(c7.723,35.21) 7.723,35.865 cw(c7.723,36.519) C3.2@7.26,36.056 ; 8.66,36.296 cw(c9.193,35.763) PMOD4.2@9.621,36.383 ; PMOD4.2@9.189,36.118 ccw(c8.738,35.847) 8.738,36.373 ; PMOD4.2@9.189,36.628 cw(c8.738,36.899) 8.738,36.373 ; PMOD4.2@9.332,35.965 ccw(c8.841,35.253) 8.229,35.865 ; PMOD4.2@9.614,36.373 8.738,36.373 ; Y1.2@63.307,60.454 63.766,60.913 C2.1@63.766,61.862 ; C2.1@63.628,61.723 cw(c63.293,61.389) 63.766,61.389 ; 63.766,60.809 cw(c64.125,60.809) v1@63.984,61.139 ; C2.1@63.766,61.595 ccw(c64.478,61.595) v1@63.975,61.092 ; PMOD3.4@79.477,28.219 PMOD3.3@82.017,28.219 84.989,28.219 C63.2@85.052,28.156 ; PMOD2.4@79.477,44.901 PMOD2.3@82.017,44.901 85.02,44.901 C72.2@85.052,44.933 ; PMOD1.4@79.477,61.582 PMOD1.3@82.017,61.582 84.925,61.582 C73.2@85.052,61.71 ; PMOD3.4@79.827,27.869 cw(c80.674,27.022) 80.674,28.219 cw(c80.674,29.417) PMOD3.4@79.827,28.57 ; PMOD2.4@79.827,44.55 cw(c80.674,43.703) 80.674,44.901 cw(c80.674,46.098) PMOD2.4@79.827,45.252 ; PMOD1.4@79.827,61.232 cw(c80.674,60.385) 80.674,61.582 cw(c80.674,62.78) PMOD1.4@79.827,61.933 ; PMOD3.3@81.666,27.869 ccw(c80.819,27.022) 80.819,28.219 ccw(c80.819,29.417) PMOD3.3@81.666,28.57 ; PMOD2.3@81.666,44.55 ccw(c80.819,43.703) 80.819,44.901 ccw(c80.819,46.098) PMOD2.3@81.666,45.252 ; PMOD1.3@81.666,61.232 ccw(c80.819,60.385) 80.819,61.582 ccw(c80.819,62.78) PMOD1.3@81.666,61.933 ; PMOD3.3@82.367,27.869 cw(c83.214,27.022) 83.214,28.219 cw(c83.214,29.417) PMOD3.3@82.367,28.57 ; PMOD2.3@82.367,44.55 cw(c83.214,43.703) 83.214,44.901 cw(c83.214,46.098) PMOD2.3@82.367,45.252 ; PMOD1.3@82.367,61.232 cw(c83.214,60.385) 83.214,61.582 cw(c83.214,62.78) PMOD1.3@82.367,61.933 ; 83.741,61.582 ccw(c83.741,62.671) C73.2@84.51,61.901 ; 83.895,28.219 cw(c83.895,27.349) C63.2@84.51,27.964 ; 83.971,44.901 ccw(c83.971,45.664) C72.2@84.51,45.124 ; 84.125,44.901 cw(c84.125,44.356) C72.2@84.51,44.741 ; 8.229,35.865 8.738,36.373
  other v1: 24.778,41.288 33.668,50.838 53.323,52.752 74.231,57.137 63.995,61.112
  other v2: 50.262,40.14 72.669,46.317 65.138,67.399 71.285,71.844 73.127,71.857 41.554,76.556
  other v4: 39.971,29.05 38.871,30.15 39.971,30.15 38.871,31.25 39.971,31.25 41.547,64.309 42.647,64.309 43.747,64.309 41.547,65.409 42.647,65.409 43.747,65.409
  other v5: 85.026,28.956 6.731,35.09 85.026,45.669 85.026,62.42
JTAG_TCK: P5.4 U5.J5 | length 29.5
  Top Layer w0.089: v1(22.664,48.18) U5.J5@23.371,48.18 ; v1@22.734,48.121 cw(c22.857,48.02) 22.898,48.174 ; v1@22.734,48.238 ccw(c22.857,48.339) 22.898,48.186 ; v1@22.791,48.052 cw(c23.1,47.744) 23.1,48.18 cw(c23.1,48.616) v1@22.791,48.307 ; v1@22.803,48.065 cw(c22.974,47.923) 23.031,48.138 ; v1@22.803,48.295 ccw(c22.974,48.436) 23.031,48.222 ; v1@22.82,48.089 cw(c23.036,47.965) 22.972,48.206 ; v1@22.82,48.27 ccw(c23.036,48.395) 22.972,48.154 ; U5.J5@23.225,48.034 ccw(c22.875,47.683) 22.875,48.18 ccw(c22.875,48.676) U5.J5@23.225,48.325 ; U5.J5@23.288,48.097 ccw(c23.089,47.898) 23.089,48.18 ccw(c23.089,48.461) U5.J5@23.288,48.262
  Bottom Layer w0.089: P5.4@8.484,49.721 10.046,49.721 ; P5.4@8.746,49.489 cw(c9.258,49.038) 9.258,49.721 cw(c9.258,50.403) P5.4@8.746,49.952 ; P5.4@8.813,49.43 cw(c9.455,48.864) 9.455,49.721 cw(c9.455,50.577) P5.4@8.813,50.011 ; P5.4@8.88,49.372 cw(c9.652,48.691) 9.652,49.721 cw(c9.652,50.75) P5.4@8.88,50.069 ; P5.4@8.946,49.313 cw(c9.849,48.518) 9.849,49.721 cw(c9.849,50.923) P5.4@8.946,50.128 ; P5.4@9.013,49.254 cw(c10.046,48.344) 10.046,49.721 ; P5.4@9.013,50.187 ccw(c10.046,51.097) 10.046,49.721 ; v1@22.483,48.18 cw(c22.047,48.18) 22.356,47.871 cw(c22.664,47.563) v1@22.664,47.999 ; v1(22.664,48.18) 20.953,46.469 13.297,46.469 10.046,49.721
JTAG_TDI: P5.8 U5.J6 | length 31
  Top Layer w0.089: v1(23.371,47.473) U5.J6@24.078,47.473 ; v1@23.441,47.414 cw(c23.564,47.313) 23.605,47.466 ; v1@23.441,47.531 ccw(c23.564,47.632) 23.605,47.479 ; v1@23.498,47.345 cw(c23.807,47.037) 23.807,47.473 cw(c23.807,47.908) v1@23.498,47.6 ; v1@23.51,47.358 cw(c23.681,47.216) 23.738,47.431 ; v1@23.51,47.588 ccw(c23.681,47.729) 23.738,47.515 ; v1@23.527,47.382 cw(c23.743,47.258) 23.679,47.499 ; v1@23.527,47.563 ccw(c23.743,47.688) 23.679,47.447 ; U5.J6@23.933,47.327 ccw(c23.582,46.976) 23.582,47.473 ccw(c23.582,47.969) U5.J6@23.933,47.618 ; U5.J6@23.995,47.39 ccw(c23.796,47.191) 23.796,47.473 ccw(c23.796,47.754) U5.J6@23.995,47.555
  Bottom Layer w0.089: P5.8@8.484,44.64 9.779,45.936 22.395,45.936 23.371,46.912 v1(23.371,47.473) ; P5.8@8.484,44.99 ccw(c8.484,45.835) 9.081,45.238 ccw(c9.678,44.64) P5.8@8.834,44.64 ; P5.8@8.484,45.079 ccw(c8.484,46.139) 9.233,45.39 ccw(c9.982,44.64) P5.8@8.922,44.64 ; P5.8@8.484,45.168 ccw(c8.484,46.442) 9.385,45.541 ccw(c10.285,44.64) P5.8@9.011,44.64 ; P5.8@8.484,45.257 ccw(c8.484,46.746) 9.536,45.693 ccw(c10.589,44.64) P5.8@9.1,44.64 ; P5.8@8.484,45.346 ccw(c8.484,47.049) 9.688,45.845 ccw(c10.892,44.64) P5.8@9.189,44.64 ; v1@23.243,47.345 cw(c22.935,47.037) 23.371,47.037 cw(c23.807,47.037) v1@23.498,47.345
JTAG_TDO: P5.6 U5.K6 | length 26.6
  Top Layer w0.089: v1(22.664,46.765) U5.K6@23.371,46.765 ; v1@22.734,46.707 cw(c22.857,46.606) 22.898,46.759 ; v1@22.734,46.824 ccw(c22.857,46.925) 22.898,46.772 ; v1@22.791,46.638 cw(c23.1,46.33) 23.1,46.765 cw(c23.1,47.201) v1@22.791,46.893 ; v1@22.803,46.65 cw(c22.974,46.509) 23.031,46.723 ; v1@22.803,46.88 ccw(c22.974,47.022) 23.031,46.808 ; v1@22.82,46.675 cw(c23.036,46.55) 22.972,46.791 ; v1@22.82,46.856 ccw(c23.036,46.981) 22.972,46.739 ; U5.K6@23.225,46.62 ccw(c22.875,46.269) 22.875,46.765 ccw(c22.875,47.262) U5.K6@23.225,46.911 ; U5.K6@23.288,46.683 ccw(c23.089,46.484) 23.089,46.765 ccw(c23.089,47.047) U5.K6@23.288,46.848
  Bottom Layer w0.089: P5.6@8.484,47.18 9.55,46.114 ; P5.6@8.523,46.743 cw(c8.593,45.963) 9.147,46.517 cw(c9.701,47.071) P5.6@8.921,47.141 ; P5.6@8.531,46.655 cw(c8.615,45.716) 9.282,46.383 cw(c9.948,47.049) P5.6@9.009,47.133 ; P5.6@8.539,46.566 cw(c8.637,45.469) 9.416,46.248 cw(c10.195,47.027) P5.6@9.098,47.125 ; P5.6@8.547,46.478 cw(c8.659,45.223) 9.55,46.114 ; P5.6@9.186,47.117 ccw(c10.441,47.005) 9.55,46.114 ; v1@22.483,46.765 cw(c22.047,46.765) 22.356,46.457 cw(c22.664,46.149) v1@22.664,46.585 ; v1(22.664,46.765) 22.012,46.114 9.55,46.114
JTAG_TMS: P5.2 U5.K7 | length 37.9
  Top Layer w0.089: U5.K7@23.933,46.204 ccw(c23.582,46.555) 24.078,46.555 ccw(c24.574,46.555) U5.K7@24.223,46.204 ; v1@23.95,46.638 cw(c23.642,46.33) 24.078,46.33 cw(c24.514,46.33) v1@24.206,46.638 ; v1@23.963,46.626 cw(c23.822,46.455) 24.036,46.398 ; v1@23.988,46.609 cw(c23.863,46.393) 24.104,46.458 ; U5.K7@23.995,46.141 ccw(c23.796,46.34) 24.078,46.34 ccw(c24.36,46.34) U5.K7@24.16,46.141 ; v1@24.02,46.695 cw(c23.919,46.573) 24.072,46.532 ; 24.052,46.458 cw(c24.293,46.393) v1@24.168,46.609 ; U5.K7@24.078,46.058 v1(24.078,46.765) ; 24.084,46.532 cw(c24.237,46.573) v1@24.136,46.695 ; 24.12,46.398 cw(c24.334,46.455) v1@24.193,46.626
  Bottom Layer w0.089: P5.2@7.778,52.261 cw(c6.075,52.261) 7.279,51.056 cw(c8.484,49.852) P5.2@8.484,51.555 ; P5.2@7.867,52.261 cw(c6.378,52.261) 7.431,51.208 cw(c8.484,50.155) P5.2@8.484,51.644 ; P5.2@7.956,52.261 cw(c6.682,52.261) 7.583,51.36 cw(c8.484,50.459) P5.2@8.484,51.733 ; P5.2@8.045,52.261 cw(c6.985,52.261) 7.734,51.511 cw(c8.484,50.762) P5.2@8.484,51.822 ; P5.2@8.134,52.261 cw(c7.289,52.261) 7.886,51.663 cw(c8.484,51.066) P5.2@8.484,51.911 ; P5.2@8.484,52.261 7.226,51.003 7.226,48.819 7.582,48.463 9.398,48.463 11.57,46.291 21.526,46.291 23.112,47.877 23.545,47.877 24.078,47.344 v1(24.078,46.765) ; v1@23.95,46.893 ccw(c23.642,47.201) 24.078,47.201 ccw(c24.514,47.201) v1@24.206,46.893
LPTMR0: Shiel1.34 U5.M11 | length 22.3
  Top Layer w0.089: U5.M11@25.492,41.816 v1(26.199,41.816) ; U5.M11@25.575,41.733 cw(c25.774,41.534) 25.774,41.816 cw(c25.774,42.097) U5.M11@25.575,41.898 ; U5.M11@25.637,41.67 cw(c25.988,41.32) 25.988,41.816 cw(c25.988,42.312) U5.M11@25.637,41.961 ; 25.832,41.774 cw(c25.889,41.559) v1@26.06,41.701 ; 25.832,41.858 ccw(c25.889,42.072) v1@26.06,41.931 ; 25.891,41.79 ccw(c25.827,42.031) v1@26.043,41.906 ; 25.891,41.842 cw(c25.827,41.601) v1@26.043,41.725 ; 25.965,41.81 cw(c26.006,41.656) v1@26.129,41.757 ; 25.965,41.822 ccw(c26.006,41.975) v1@26.129,41.874 ; v1@26.072,41.688 ccw(c25.763,41.38) 25.763,41.816 ccw(c25.763,42.252) v1@26.072,41.943
  Bottom Layer w0.089: Shiel1.34@24.671,31.682 ccw(c24.139,32.215) 24.892,32.215 ; Shiel1.34@24.734,31.619 ccw(c24.354,32) 24.892,32 ; 24.892,32.061 ccw(c25.695,32.061) Shiel1.34@25.127,31.494 ; 24.892,32.276 ccw(c25.909,32.276) Shiel1.34@25.19,31.556 ; 24.892,32.491 ccw(c26.124,32.491) Shiel1.34@25.253,31.619 ; 24.892,32.705 ccw(c26.339,32.705) Shiel1.34@25.316,31.682 ; Shiel1.34@24.994,30.645 24.892,30.747 24.892,32.944 27.303,35.355 27.303,41.658 27.145,41.816 v1(26.199,41.816) ; v1@26.327,41.688 cw(c26.635,41.38) 26.635,41.816 cw(c26.635,42.252) v1@26.327,41.943
MODE0: R1.1 R2.2 U1.M9 | length 33.1
  Top Layer w0.089: U1.M9@58.98,53.459 v1(59.687,53.459) ; U1.M9@59.107,53.331 cw(c59.416,53.023) 59.416,53.459 cw(c59.416,53.895) U1.M9@59.107,53.586 ; v1@59.559,53.331 ccw(c59.251,53.023) 59.251,53.459 ccw(c59.251,53.895) v1@59.559,53.586
  Bottom Layer w0.089: v1(59.687,53.459) 73.355,67.127 73.355,68.961 73.419,69.025 ; v1@59.687,53.639 ccw(c59.687,54.075) 59.995,53.767 ccw(c60.303,53.459) v1@59.867,53.459 ; 73.551,69.025 cw(c73.551,68.843) R1.1@73.719,68.912 ; 73.56,69.025 ccw(c73.56,69.208) R1.1@73.725,69.129 ; R1.1@73.637,68.878 ccw(c73.419,68.789) 73.419,69.025 ; R1.1@73.645,69.167 cw(c73.419,69.275) 73.419,69.025 ; R1.1@73.764,69.265 ccw(c73.157,69.872) 74.016,69.872 ccw(c74.874,69.872) R1.1@74.267,69.265 ; R2.2@73.764,70.194 cw(c73.157,69.587) 74.016,69.587 cw(c74.874,69.587) R2.2@74.267,70.194 ; R1.1@73.827,69.202 ccw(c73.372,69.657) 74.016,69.657 ccw(c74.659,69.657) R1.1@74.204,69.202 ; R2.2@73.827,70.257 cw(c73.372,69.802) 74.016,69.802 cw(c74.659,69.802) R2.2@74.204,70.257 ; R1.1@73.89,69.139 ccw(c73.586,69.442) 74.016,69.442 ccw(c74.445,69.442) R1.1@74.141,69.139 ; R2.2@73.89,70.32 cw(c73.586,70.016) 74.016,70.016 cw(c74.445,70.016) R2.2@74.141,70.32 ; R2.2@74.016,70.445 R1.1@74.016,69.013 74.004,69.025 73.419,69.025
MODE1: R4.1 R5.2 U1.M10 | length 34
  Top Layer w0.089: U1.M10@58.273,54.166 v1(58.98,54.166) ; U1.M10@58.4,54.038 cw(c58.708,53.73) 58.708,54.166 cw(c58.708,54.602) U1.M10@58.4,54.294 ; v1@58.852,54.038 ccw(c58.544,53.73) 58.544,54.166 ccw(c58.544,54.602) v1@58.852,54.294
  Bottom Layer w0.089: v1(58.98,54.166) 60.11,54.166 73.038,67.094 73.038,68.923 72.947,69.013 ; v1@59.107,54.038 cw(c59.416,53.73) 59.416,54.166 cw(c59.416,54.602) v1@59.107,54.294 ; R4.1@71.954,69.265 ccw(c71.347,69.872) 72.206,69.872 ccw(c73.064,69.872) R4.1@72.457,69.265 ; R5.2@71.954,70.194 cw(c71.347,69.587) 72.206,69.587 cw(c73.064,69.587) R5.2@72.457,70.194 ; R4.1@72.017,69.202 ccw(c71.562,69.657) 72.206,69.657 ccw(c72.85,69.657) R4.1@72.394,69.202 ; R5.2@72.017,70.257 cw(c71.562,69.802) 72.206,69.802 cw(c72.85,69.802) R5.2@72.394,70.257 ; R4.1@72.08,69.139 ccw(c71.777,69.442) 72.206,69.442 ccw(c72.635,69.442) R4.1@72.332,69.139 ; R5.2@72.08,70.32 cw(c71.777,70.016) 72.206,70.016 cw(c72.635,70.016) R5.2@72.332,70.32 ; R5.2@72.206,70.445 R4.1@72.206,69.013 72.947,69.013 ; R4.1@72.473,68.858 cw(c72.774,68.642) 72.774,69.013 cw(c72.774,69.384) R4.1@72.473,69.168 ; R4.1@72.545,68.806 cw(c72.947,68.519) 72.947,69.013 ; R4.1@72.545,69.22 ccw(c72.947,69.508) 72.947,69.013
MODE2: R6.1 R7.2 U1.M11 | length 35.1
  Top Layer w0.089: U1.M11@57.565,54.873 57.689,54.75 v1(58.268,54.75) cw(c58.268,55.532) U1.M11@57.697,54.997 ; U1.M11@57.565,54.873 ccw(c57.857,55.147) 57.857,54.75 ; U1.M11@57.632,54.936 ccw(c58.062,55.339) v1@58.062,54.75 ; 57.875,54.796 ccw(c57.94,55.057) v1@58.136,54.873 ; 57.949,54.778 cw(c57.885,54.52) v1@58.113,54.657 ; 58.022,54.76 ccw(c58.067,54.938) v1@58.201,54.812 ; v1@58.107,54.668 ccw(c57.782,54.503) 57.876,54.855 ccw(c57.971,55.206) v1@58.169,54.901 ; v1@58.14,54.622 ccw(c57.832,54.314) 57.832,54.75 ccw(c57.832,55.186) v1@58.14,54.877
  Bottom Layer w0.089: v1(58.268,54.75) 60.35,54.75 71.234,65.634 71.234,68.809 71.03,69.013 ; v1@58.268,54.868 v1@58.273,54.873 ; v1@58.395,54.622 cw(c58.703,54.314) 58.703,54.75 cw(c58.703,55.186) v1@58.395,54.877 ; R6.1@70.145,69.265 ccw(c69.538,69.872) 70.396,69.872 ccw(c71.254,69.872) R6.1@70.648,69.265 ; R7.2@70.145,70.194 cw(c69.538,69.587) 70.396,69.587 cw(c71.254,69.587) R7.2@70.648,70.194 ; R6.1@70.208,69.202 ccw(c69.752,69.657) 70.396,69.657 ccw(c71.04,69.657) R6.1@70.585,69.202 ; R7.2@70.208,70.257 cw(c69.752,69.802) 70.396,69.802 cw(c71.04,69.802) R7.2@70.585,70.257 ; R6.1@70.27,69.139 ccw(c69.967,69.442) 70.396,69.442 ccw(c70.825,69.442) R6.1@70.522,69.139 ; R7.2@70.27,70.32 cw(c69.967,70.016) 70.396,70.016 cw(c70.825,70.016) R7.2@70.522,70.32 ; R7.2@70.396,70.445 R6.1@70.396,69.013 71.03,69.013 ; R6.1@70.683,68.891 cw(c70.884,68.788) 70.884,69.013 cw(c70.884,69.239) R6.1@70.683,69.136 ; R6.1@70.762,68.85 cw(c71.03,68.712) 71.03,69.013 ; R6.1@70.762,69.176 ccw(c71.03,69.314) 71.03,69.013
N_RST: C69.2 P5.10 R42.2 S5.2 U5.L12 | length 52.4
  Top Layer w0.089: U5.L12@26.761,41.67 cw(c26.41,41.32) 26.906,41.32 cw(c27.403,41.32) U5.L12@27.052,41.67 ; v1@26.779,41.236 ccw(c26.47,41.545) 26.906,41.545 ccw(c27.342,41.545) v1@27.034,41.236 ; v1@26.791,41.248 ccw(c26.65,41.419) 26.864,41.476 ; v1@26.816,41.265 ccw(c26.691,41.481) 26.932,41.417 ; U5.L12@26.824,41.733 cw(c26.625,41.534) 26.906,41.534 cw(c27.188,41.534) U5.L12@26.989,41.733 ; v1@26.848,41.179 ccw(c26.747,41.302) 26.9,41.343 ; 26.88,41.417 ccw(c27.121,41.481) v1@26.997,41.265 ; v1@26.906,41.064 v1(26.906,41.109) U5.L12@26.906,41.816 ; 26.913,41.343 ccw(c27.066,41.302) v1@26.965,41.179 ; 26.948,41.476 ccw(c27.163,41.419) v1@27.021,41.248
  Bottom Layer w0.089: P5.10@8.484,42.1 10.784,44.401 R42.2@13.157,44.401 C69.2@14.58,44.401 15.569,44.401 19.355,40.615 26.412,40.615 v1(26.906,41.109) ; P5.10@8.484,42.45 ccw(c8.484,43.295) 9.081,42.698 ccw(c9.678,42.1) P5.10@8.834,42.1 ; P5.10@8.484,42.539 ccw(c8.484,43.599) 9.233,42.85 ccw(c9.982,42.1) P5.10@8.922,42.1 ; P5.10@8.484,42.628 ccw(c8.484,43.902) 9.385,43.001 ccw(c10.285,42.1) P5.10@9.011,42.1 ; P5.10@8.484,42.717 ccw(c8.484,44.206) 9.536,43.153 ccw(c10.589,42.1) P5.10@9.1,42.1 ; P5.10@8.484,42.806 ccw(c8.484,44.509) 9.688,43.305 ccw(c10.892,42.1) P5.10@9.189,42.1 ; v1@12.128,44.273 ccw(c11.82,43.965) 11.82,44.401 ccw(c11.82,44.837) v1@12.128,44.528 ; v1@12.323,44.339 cw(c12.457,44.216) 12.497,44.393 ; v1@12.323,44.463 ccw(c12.457,44.585) 12.497,44.408 ; v1@12.335,44.355 cw(c12.532,44.241) 12.473,44.461 ; v1@12.335,44.447 ccw(c12.532,44.56) 12.473,44.341 ; v1@12.346,44.244 cw(c12.561,43.872) 12.672,44.287 ; v1@12.346,44.557 ccw(c12.561,44.929) 12.672,44.514 ; v1@12.383,44.273 cw(c12.691,43.965) 12.691,44.401 cw(c12.691,44.837) v1@12.383,44.528 ; v1@12.389,44.279 cw(c12.587,44.097) 12.646,44.359 ; v1@12.389,44.523 ccw(c12.587,44.705) 12.646,44.442 ; v1@12.408,44.304 cw(c12.644,44.155) 12.583,44.428 ; v1@12.408,44.497 ccw(c12.644,44.646) 12.583,44.374 ; v1@12.412,44.31 cw(c12.794,44.09) 12.68,44.516 ; v1@12.412,44.491 ccw(c12.794,44.712) 12.68,44.285 ; R42.2@12.856,44.149 ccw(c12.249,43.542) 12.249,44.401 ccw(c12.249,45.259) R42.2@12.856,44.652 ; R42.2@12.919,44.212 ccw(c12.463,43.757) 12.463,44.401 ccw(c12.463,45.044) R42.2@12.919,44.589 ; R42.2@12.982,44.275 ccw(c12.678,43.972) 12.678,44.401 ccw(c12.678,44.83) R42.2@12.982,44.526 ; R42.2@13.333,44.275 cw(c13.636,43.972) 13.636,44.401 cw(c13.636,44.83) R42.2@13.333,44.526 ; R42.2@13.396,44.212 cw(c13.851,43.757) 13.851,44.401 cw(c13.851,45.044) R42.2@13.396,44.589 ; R42.2@13.459,44.149 cw(c14.066,43.542) 14.066,44.401 cw(c14.066,45.259) R42.2@13.459,44.652 ; C69.2@14.278,44.149 ccw(c13.671,43.542) 13.671,44.401 ccw(c13.671,45.259) C69.2@14.278,44.652 ; C69.2@14.341,44.212 ccw(c13.886,43.757) 13.886,44.401 ccw(c13.886,45.044) C69.2@14.341,44.589 ; C69.2@14.404,44.275 ccw(c14.1,43.972) 14.1,44.401 ccw(c14.1,44.83) C69.2@14.404,44.526 ; C69.2@14.755,44.275 cw(c15.059,43.972) 15.059,44.401 cw(c15.059,44.83) C69.2@14.755,44.526 ; C69.2@14.818,44.212 cw(c15.273,43.757) 15.273,44.401 cw(c15.273,45.044) C69.2@14.818,44.589 ; C69.2@14.881,44.149 cw(c15.488,43.542) 15.488,44.401 cw(c15.488,45.259) C69.2@14.881,44.652 ; v1@26.726,41.109 cw(c26.29,41.109) 26.598,40.8 cw(c26.906,40.492) v1@26.906,40.928
  other v1: 12.255,44.401
NetC9_2: C9.2 C14.1 FB1.2 U1.G8 | length 7.8
  Top Layer w0.203: v1@56.064,48.596 ccw(c55.853,48.807) 56.151,48.807 ccw(c56.449,48.807) v1@56.238,48.596 ; U1.G8@56.064,49.129 cw(c55.853,48.918) 56.151,48.918 cw(c56.449,48.918) U1.G8@56.238,49.129 ; v1(56.151,48.509) U1.G8@56.151,49.216
  Bottom Layer w0.203: FB1.2@55.016,49.081 C9.2@55.982,49.081 ; FB1.2@55.121,48.976 cw(c55.375,48.723) 55.375,49.081 cw(c55.375,49.439) FB1.2@55.121,49.186 ; C9.2@55.877,48.976 ccw(c55.623,48.723) 55.623,49.081 ccw(c55.623,49.439) C9.2@55.877,49.186 ; C9.2@55.878,48.925 cw(c55.638,48.679) 55.982,48.679 ; 55.982,48.684 ccw(c56.277,48.684) v1@56.105,48.444 ; C9.2@56.085,48.925 ccw(c56.325,48.679) 55.982,48.679 ; C9.2@56.087,48.976 cw(c56.34,48.723) 56.34,49.081 cw(c56.34,49.439) C9.2@56.087,49.186 ; v1(56.151,48.509) 55.982,48.679 ; v1@56.223,48.609 cw(c56.562,49.081) C9.2@55.982,49.081 ; C14.1@56.816,48.976 ccw(c56.563,48.723) 56.563,49.081 ccw(c56.563,49.439) C14.1@56.816,49.186 ; C14.1@56.921,49.081 C9.2@55.982,49.081 ; 55.982,48.679 C9.2@55.982,49.081
NetC64_2: C64.2 R36.1 R38.1 Y3.1 | length 39.8
  Top Layer w0.152: C64.2@17.483,37.769 ccw(c17.345,38.61) 18.072,38.166 ; C64.2@17.488,37.77 ccw(c17.394,38.402) 17.947,38.082 ; C64.2@17.508,37.619 ccw(c17.416,38.176) 17.898,37.882 ; C64.2@17.51,37.619 ccw(c17.453,38.003) 17.789,37.809 ; C64.2@17.526,37.774 ccw(c17.516,38.104) 17.803,37.939 ccw(c18.068,37.786) C64.2@17.809,37.623 ; C64.2@17.536,37.621 ccw(c17.536,38.035) 17.828,37.742 ccw(c18.121,37.45) C64.2@17.707,37.45 ; C64.2@17.536,37.774 ccw(c17.536,38.555) 18.088,38.003 ccw(c18.641,37.45) C64.2@17.859,37.45 ; C64.2@17.645,37.559 ccw(c16.851,38.353) Y3.1@17.838,38.888 ; Y3.1@17.704,38.816 cw(c16.663,38.252) C64.2@17.5,37.415 18.318,38.232 Y3.1@18.318,39.15 18.318,40.086 R38.1@19.266,41.034 ; C64.2@17.789,37.703 ccw(c17.038,38.455) Y3.1@17.972,38.961 ; C64.2@17.848,37.534 cw(c18.472,37.701) 17.913,38.023 ; C64.2@17.85,37.526 cw(c18.331,37.642) 17.909,37.9 ; 17.934,37.848 ccw(c17.225,38.556) Y3.1@18.106,39.034 ; 18.078,37.992 ccw(c17.413,38.658) Y3.1@18.24,39.106 ; Y3.1@18.119,39.066 cw(c18.964,39.431) Y3.1@18.313,40.081 ; 18.222,38.137 ccw(c17.6,38.759) Y3.1@18.374,39.179 ; Y3.1@18.258,39.126 cw(c19.186,39.526) 18.472,40.24 ; Y3.1@18.367,38.281 ccw(c17.787,38.861) Y3.1@18.508,39.251 ; Y3.1@18.398,39.187 cw(c19.407,39.622) 18.63,40.399 ; Y3.1@18.538,39.247 cw(c19.629,39.718) 18.789,40.558 ; 18.672,40.318 cw(c19.37,39.835) R38.1@19.269,40.677 ; Y3.1@18.678,39.308 cw(c19.851,39.813) R38.1@18.948,40.716 ; 18.747,40.266 cw(c19.527,39.806) R38.1@19.309,40.684 ; Y3.1@18.818,39.368 cw(c20.073,39.909) R38.1@19.107,40.875 ; 18.825,40.539 ccw(c18.383,40.844) R38.1@18.912,40.941 ; 18.849,40.438 ccw(c18.304,40.76) R38.1@18.917,40.918 ; 18.865,40.596 cw(c19.316,40.284) R38.1@19.251,40.828 ; R38.1@18.906,40.999 cw(c18.125,40.999) 18.677,40.446 cw(c19.23,39.893) R38.1@19.23,40.675 ; R38.1@18.929,40.88 cw(c18.401,40.672) 18.893,40.388 cw(c19.425,40.081) R38.1@19.297,40.682 ; 18.932,40.579 cw(c19.404,40.301) R38.1@19.272,40.832 ; Y3.1@18.958,39.428 cw(c20.295,40.005) R38.1@19.266,41.034 ; R38.1@19.059,40.999 cw(c18.645,40.999) 18.938,40.706 cw(c19.23,40.413) R38.1@19.23,40.827 ; R38.1@19.301,41.393 ccw(c19.301,42.084) 19.79,41.596 ; R38.1@19.446,41.252 cw(c20.247,40.452) R36.1@20.247,41.584 ; R38.1@19.472,41.069 cw(c19.977,41.069) 19.62,41.426 ; R38.1@19.625,41.069 cw(c20.497,41.069) 19.88,41.686 ; 19.706,41.512 cw(c20.247,40.972) R36.1@20.247,41.736 ; 19.797,41.603 ccw(c19.492,41.908) R36.1@19.923,41.908 ; R36.1@20.168,41.974 19.266,41.071 R38.1@19.266,41.034